# Altium PCB LED_Board.PcbDoc
Units mm, origin at the board's own origin, x right, y up, seen from the top; angles counter-clockwise.
Board outline 5 x 7.5 mm, 2 copper layers (Top Layer, Bottom Layer); 2 components, 3 nets, 6 pads, 14 vias.
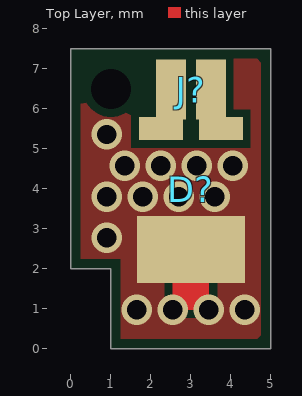
[diagram p0: Top Layer view]
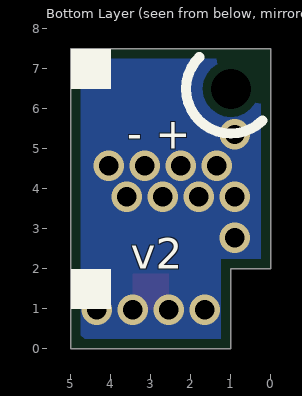
[diagram p1: Bottom Layer view, seen from below]

## Layer stack, top to bottom
Top Solder: solder mask 0.0102, Solder Resist, Dk 3.5
Top Layer: signal copper 0.0356
Dielectric 1: dielectric 0.32, FR-4, Dk 4.8
Bottom Layer: signal copper 0.0356
Bottom Solder: solder mask 0.0102, Solder Resist, Dk 3.5

## Board outline
1,0 1,2 0,2 0,7.5 5,7.5 5,0 1,0

## Design rules (kind name [scope] priority, off if disabled: settings)
Clearance [All] p1: gap=0.203
ComponentClearance [All] p1: gap=0.127 collisioncheckmode=3 verticalgap=0.254 showdistances=FALSE
PolygonConnect [All] p1: connectstyle=Direct reliefconductorwidth=0.254 reliefentries=4 polygonreliefangle="90 Angle" airgapwidth=0.254
RoomDefinition LED_Board [InComponentClass('LED_Board')] p1: confinementstyle=ConfineIn formatcopy=TRUE lockcomponents=FALSE outline -1.5,-1 10.6,-1 10.6,8.6 -1.5,8.6
RoutingVias [All] p1: holewidth=0.483 width=0.762 viastyle="Through Hole" minholewidth=0.483 minwidth=0.762 maxholewidth=0.711 maxwidth=1.27
SolderMaskExpansion [All] p1: expansion=0.102
UnpouredPolygon [All] p1: allowunpoured=FALSE
Width [All] p1: maxlimit=0.254 minlimit=0.254 preferedwidth=0.254
28 further rules are at their usual default settings.

## Components (designator, comment, footprint, x,y, rotation, side; value= is the part's Value field where it differs from the comment)
D? "Luxeon Rebel" "Luxeon Rebel" 3,3 r90 top
J? "2 Pin Connector" "2pin smd pad for LED connector" 3,6.477 r180 top

## Footprints (in the part's own frame and the unit in brackets; to place one, negate y for a bottom-side part, rotate by r counter-clockwise, add the part's x,y. Pads: shape width x height; smd on the part's side, far side on the other; paste and mask are expansions set on the pad)
"2pin smd pad for LED connector" [mm] "1mm pitch"
  rect 0.75x1.5 smd mask+0: 1(-0.5,0) 2(0.5,0)
"Luxeon Rebel" [mm]
  rect 0.57x1.1 smd mask+0: A(2.505,0.75) C(2.505,-0.75)
  rect 1.67x2.7 smd mask+0: THERM(-0.515,0)

## Free pads (board coordinates)
  rect 0x0 hole 1 unplated: HOLE(1,6.5)

## Via types
v1: diameter 0.762, hole 0.483, Top Layer to Bottom Layer, tented both sides, 14 vias

## Nets (pads, with @x,y where several pads share a name; then routed paths per layer and width w, separated by ;. In a path a pad name is that pad's centre, name@x,y a point inside that pad or via, vN(x,y) a via of type N, cw(c..) or ccw(c..) an arc to the next point about the centre after c; other vN are vias at no path point)
NetD?_A: D?.A J?.2
NetD?_C: D?.C J?.1
THERM: D?.THERM
  other v1: 1.65,0.98 2.55,0.98 3.45,0.98 4.35,0.98 0.9,2.78 0.9,3.8 1.8,3.8 2.7,3.8 3.6,3.8 1.35,4.58 2.25,4.58 3.15,4.58 4.05,4.58 0.9,5.36

## Polygon pours and split planes (outlines as drawn)
THERM on Top Layer "thermal" (solid, pour order 4): 1.254,0.254 4.746,0.254 4.746,7.246 0.254,7.246 0.254,2.254 1.254,2.254
THERM on Bottom Layer "thermal" (solid, pour order 3): 1.254,0.254 4.746,0.254 4.746,7.246 0.254,7.246 0.254,2.254 1.254,2.254

## Other copper
Top Layer:
  region net THERM: 2.55,1.88 3.45,1.88 3.45,0.98 2.55,0.98

## Silkscreen, mask and mechanical layers (free items; w line width, h text height)
Bottom Overlay:
  rectangle: 4,6.5 5,7.5
  rectangle: 4,1 5,2
  lines w0.254: 0.209,5.709 ccw(c1,6.5) 1.791,7.291
  text "+ -" at 2,5 h0.76
  text "v2" at 3.5,2 h0.76
Mechanical 1:
  the board outline again, w0